# Altium PCB PCB_2021-02-12_03-04-00_2021-02-18.pcbdoc
Units mil, origin at the board's own origin, x right, y up, seen from the top; angles counter-clockwise.
Board outline 4267.5 x 3450 mil, 2 copper layers (Top Layer, Bottom Layer); 52 components, 41 nets, 185 pads, 63 vias.
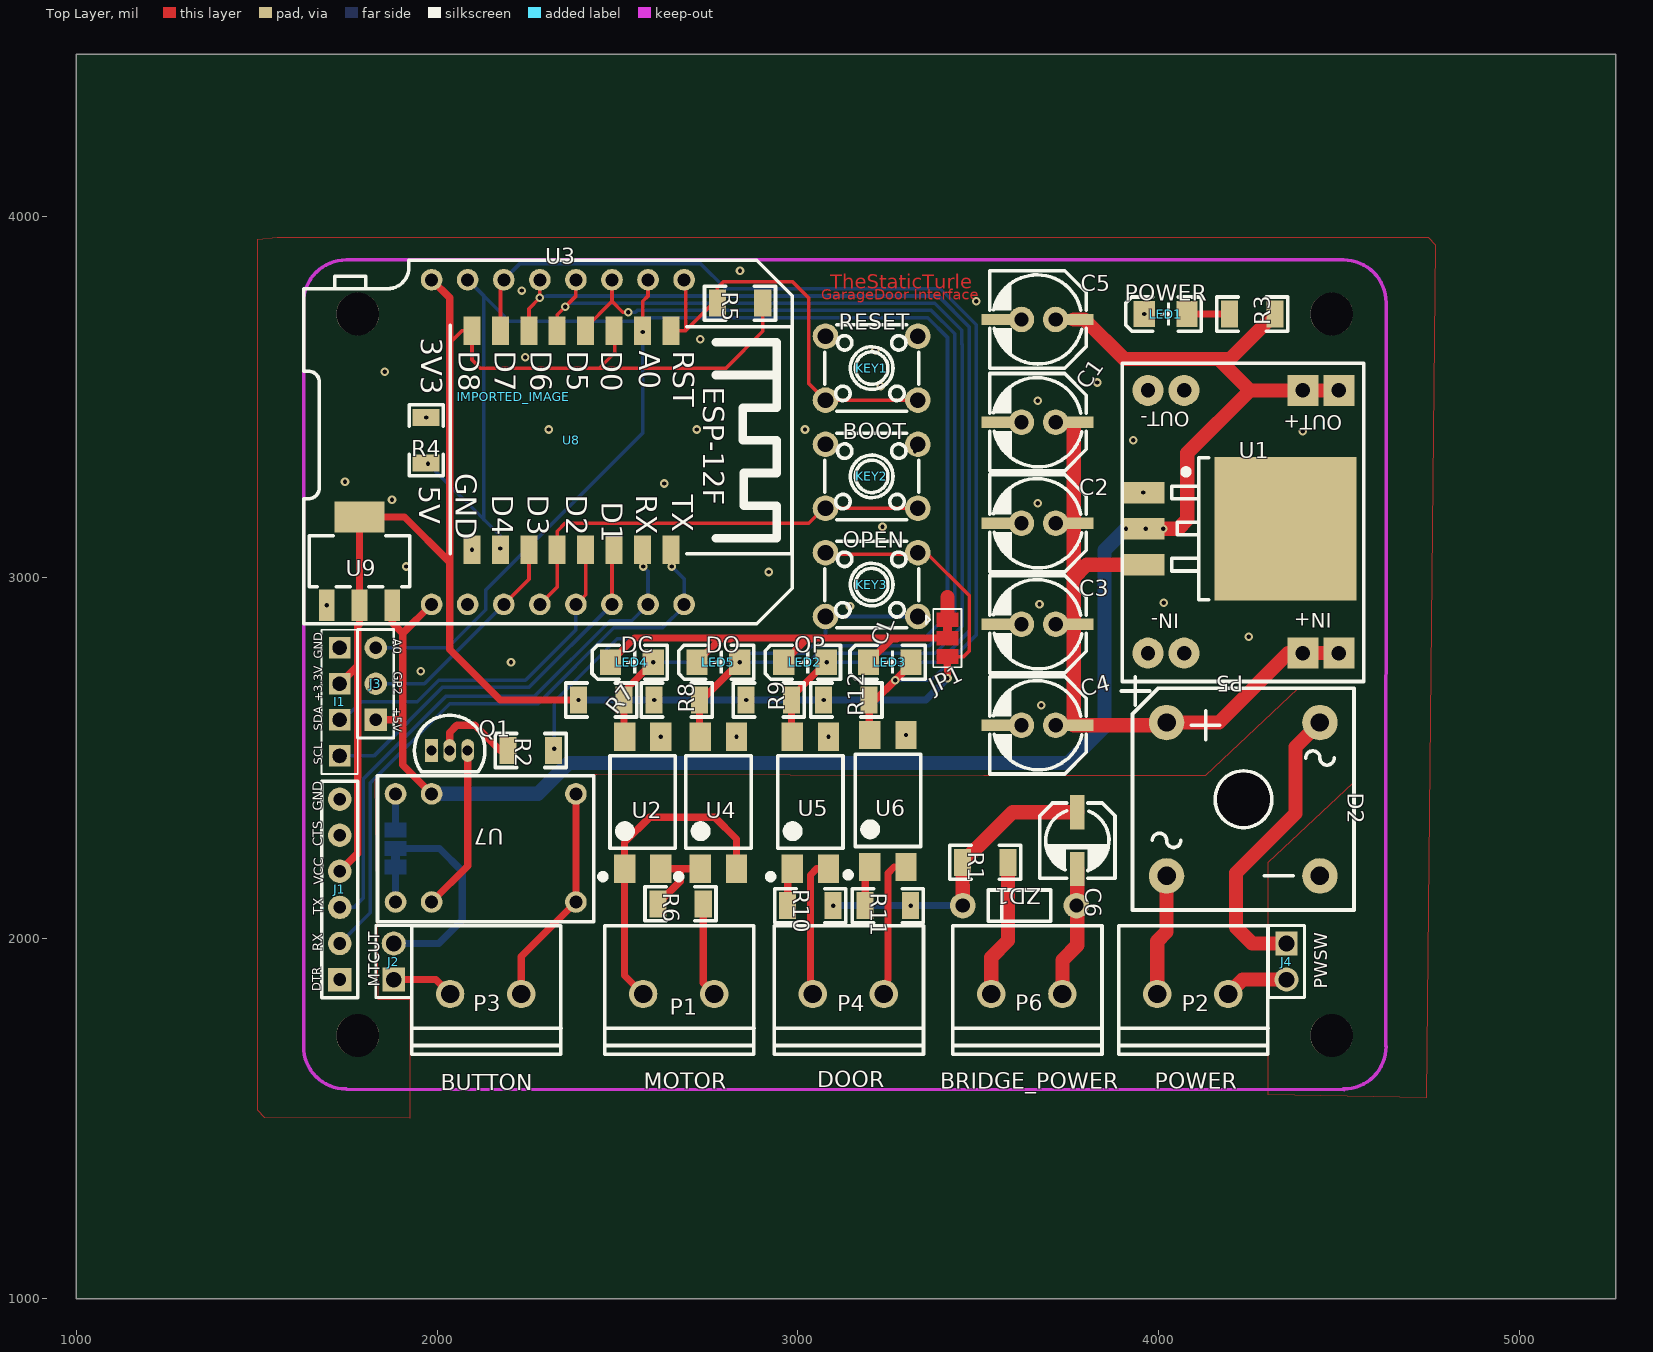
[diagram p0: Top Layer view]
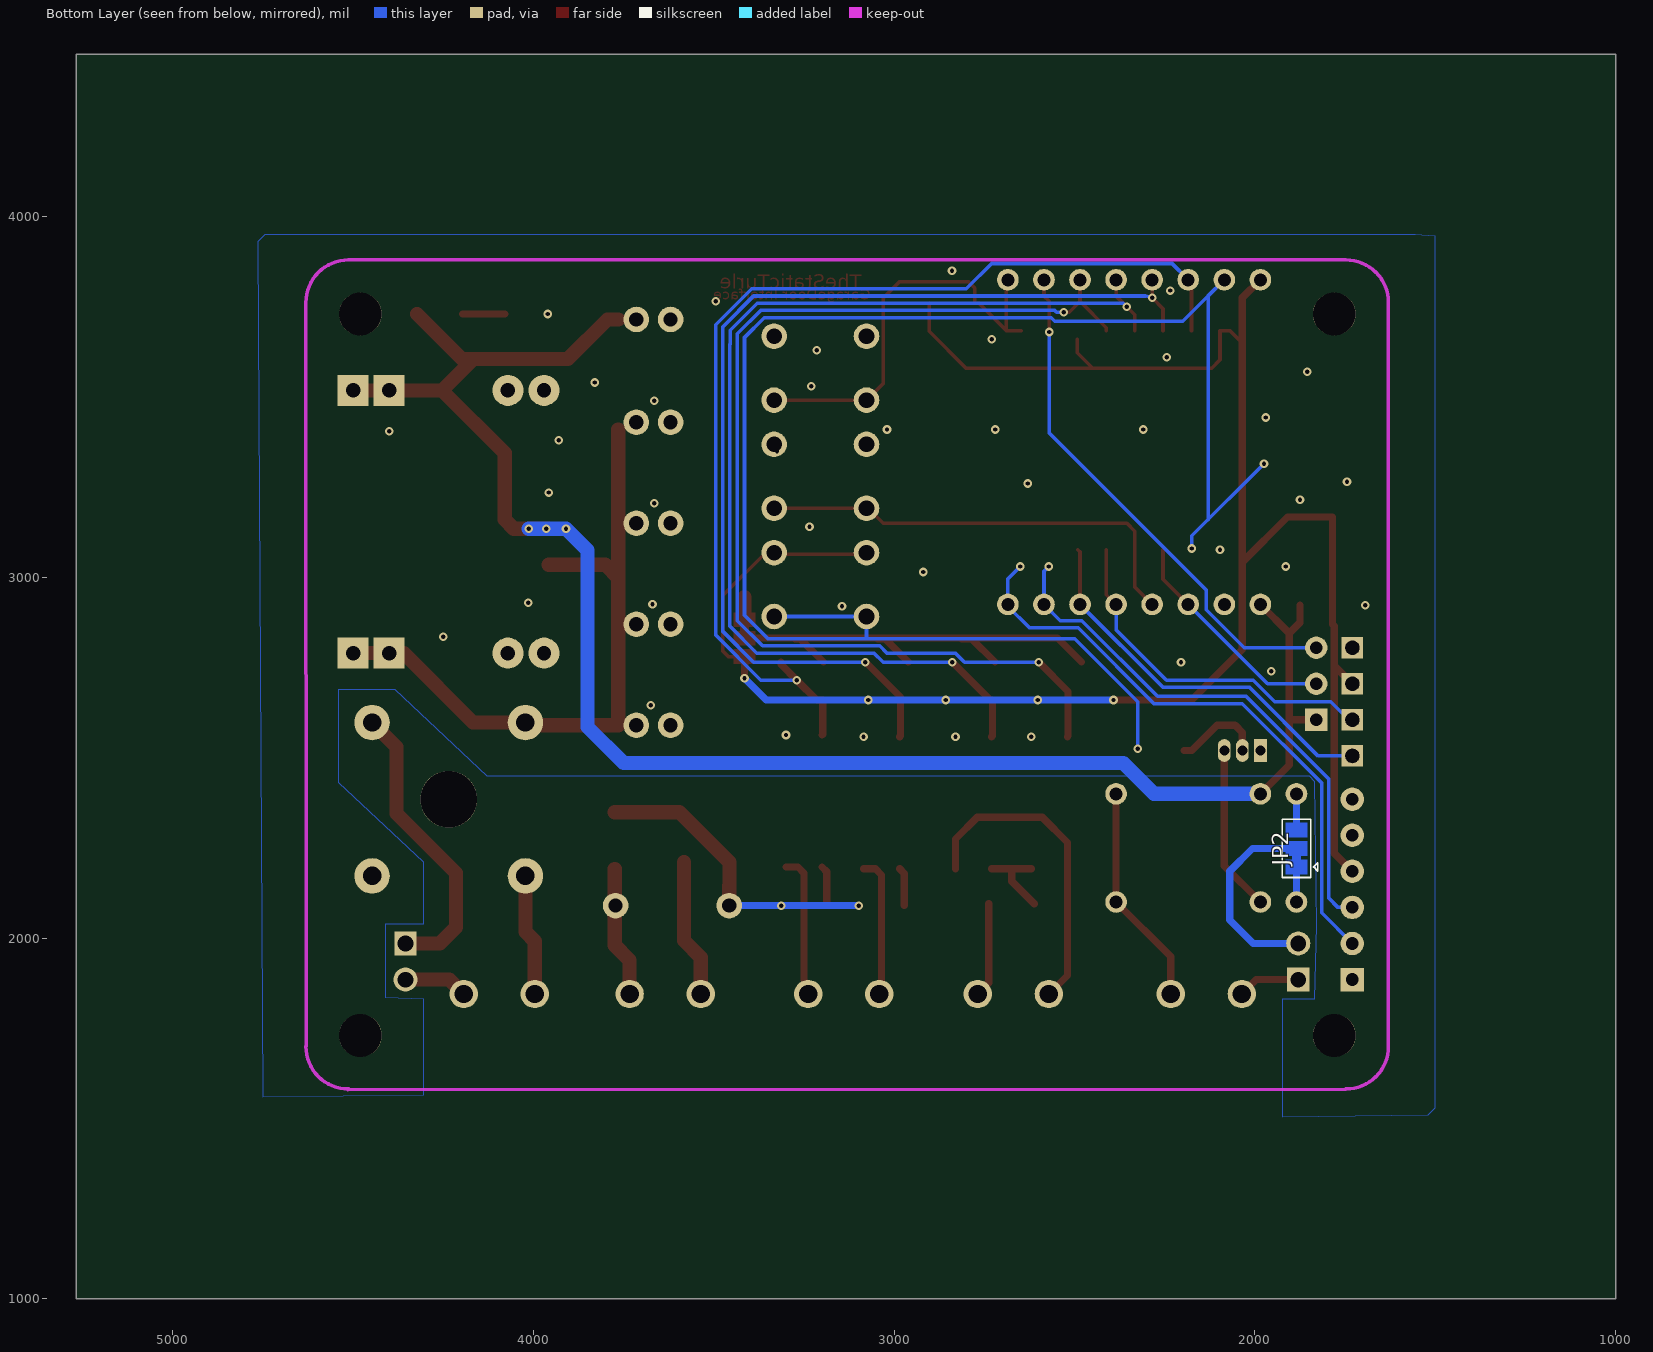
[diagram p1: Bottom Layer view, seen from below]

## Layer stack, top to bottom
Top Layer: signal copper (thickness not stored)
Dielectric: dielectric 12.6, FR-4, Dk 4.8
Bottom Layer: signal copper (thickness not stored)

## Board outline
5267.5,1000 1000,1000 1000,4450 5267.5,4450

## Components (designator, comment, footprint, x,y, rotation, side; value= is the part's Value field where it differs from the comment)
C1 "100u" CAP-D6.3×H5.5 3565,3430 r0 top
C2 "100u" CAP-D6.3×H5.5 3565,3150 r0 top
C3 "100u" CAP-D6.3×H5.5 3565,2870 r0 top
C4 "100u" CAP-D6.3×H5.5 3565,2590 r0 top
C5 "100u" CAP-D6.3×H5.5 3565,3715 r0 top
C6 "10uF" CAP-SMD_BD5.0-L5.3-W5.3-FD 3775,2270 r270 top
D2 "KBPC608" BR-6_4P-L15.2-W15.2-P10.8-BL 4235,2385 r270 top
I1 "I2C" I2C 1730,2655 r270 top
IMPORTED_IMAGE "IMPORTED_IMAGE" IMPORTED_IMAGE 2213.26,3500.59 r0 top
J1 "FTDI" FTDI 1730,2085 r180 top
J2 "MTCUT" HDR-M-2.54_1X2 1880,1935 r90 top
J3 "HDR-M-2.54_1x3" HDR-M-2.54_1X3 1830,2705 r90 top
J4 "PWSW" HDR-M-2.54_1X2 4355,1935 r270 top
JP1 "SolderJumper_3_Bridged23-A500Components" SOLDERJUMPER-3_P1.3MM_BRIDGED12_PAD1.0X1.5MM#1 3460,2815 r270 top
JP2 "SolderJumper_3_Bridged23-A500Components" SOLDERJUMPER-3_P1.3MM_BRIDGED12_PAD1.0X1.5MM#2 1930,2265 r270 bottom
KEY1 "RESET" KEY-TH_4P-L6.0-W6.0-P4.50-LS6.5 3205,3580 r0 top
KEY2 "BOOT" KEY-TH_4P-L6.0-W6.0-P4.50-LS6.5 3205,3280 r0 top
KEY3 "OPEN" KEY-TH_4P-L6.0-W6.0-P4.50-LS6.5 3205,2980 r0 top
LED1 "POWER" LED1206-R-RD 4020,3730 r0 top
LED2 "OP" LED1206-R-RD 3020,2765 r0 top
LED3 "CL" LED1206-R-RD 3255,2765 r0 top
LED4 "DC" LED1206-R-RD 2540,2765 r0 top
LED5 "DO" LED1206-R-RD 2780,2765 r0 top
P1 "MOTOR" CONN-TH_2P-P5.00 2670,1845 r180 top
P2 "POWER" CONN-TH_2P-P5.00 4095,1845 r180 top
P3 "BUTTON" CONN-TH_2P-P5.00 2135,1845 r180 top
P4 "DOOR" CONN-TH_2P-P5.00 3140,1845 r180 top
P5 "DC-DC BUCK STEP DOWN" DC-DC_BUCK 4500,2790 r180 top
P6 "BRIDGE_POWER" CONN-TH_2P-P5.00 3635,1845 r180 top
Q1 "2N2222" TO-92-3_L4.9-W3.7-P1.27-L 2035,2520 r0 top
R1 "10k" R1206 3520,2210 r180 top
R2 "4.7k" R1206 2260,2520 r180 top
R3 "4.7k" R1206 4259.99,3730 r0 top
R4 "10k" R1206 1970,3380 r270 top
R5 "10k" R1206 2840,3760 r0 top
R6 "4.7k" R1206 2675,2095 r180 top
R7 "4.7k" R1206 2455,2660 r0 top
R8 "4.7k" R1206 2665,2660 r0 top
R9 "4.7k" R1206 2920,2660 r0 top
R10 "1.8k" R1206 3034.99,2090 r180 top
R11 "1.8k" R1206 3249.99,2090 r180 top
R12 "4.7k" R1206 3135,2660 r0 top
U1 "UZ1085L-50" TO-263-3_L8.6-W10.2-P2.54-LS14.4-TL 4155,3135 r0 top
U2 "CT817C(SL)(T1)-H" CT817C 2570,2375 r90 top
U3 "WEMOS D1 MINI" "WEMOS D1 MINI" 1985,3825 r0 top
U4 "CT817C(SL)(T1)-H" CT817C 2780,2375 r90 top
U5 "CT817C(SL)(T1)-H" CT817C 3035,2375 r90 top
U6 "CT817C(SL)(T1)-H" CT817C 3250,2380 r90 top
U7 "G2E-187P-M" G2E-187P-M 2135,2250 r0 top
U8 "esp12F" ESP12F_SMD_MIN 2420,3380 r270 top
U9 "AMS1117-3.3" SOT-223-3_L6.5-W3.4-P2.30-LS7.0-BR 1785,3045 r270 top
ZD1 "BZX55C2V7" DO-35_BD2.0-L4.0-P8.00-D0.5-FD 3615,2090 r180 top

## Footprints (in the part's own frame and the unit in brackets; to place one, negate y for a bottom-side part, rotate by r counter-clockwise, add the part's x,y. Pads: shape width x height; smd on the part's side, far side on the other; paste and mask are expansions set on the pad)
BR-6_4P-L15.2-W15.2-P10.8-BL [mm]
  round 2.5 hole 1.3: 1(-5.4,-5.4) 2(5.4,-5.4) 3(5.4,5.4) 4(-5.4,5.4)
  silkscreen extent -8.62,-8.6 7.8,7.8
CAP-D6.3×H5.5 [mm]
  rect 2.8x0.8 smd: 1(5.08,0) 2(0,0)
  silkscreen extent -0.83,-3.43 5.97,3.43
CAP-SMD_BD5.0-L5.3-W5.3-FD [mm]
  rect 2.4x1 smd: 1(-2,0) 2(2,0)
  silkscreen extent -2.65,-2.65 2.65,2.65
CONN-TH_2P-P5.00 [mm]
  round 2 hole 1.3: 1(-2.504,0) 2(2.504,0)
  silkscreen extent -5.32,-4.8 5.21,4.23
CT817C [mm]
  rect 2x1.5 smd: 1(-4.65,1.27) 2(-4.65,-1.27) 3(4.65,-1.27) 4(4.65,1.27)
  silkscreen extent -5.4,-2.3 3.3,3
DC-DC_BUCK [mil]
  rect 85.98x85.98 hole 40: 1(0,0) 1(99.96,0) 3(0,-728.35) 3(100,-728.35)
  round 85.98 hole 40: 2(429.13,0) 2(529.13,0) 4(429.13,-728.35) 4(529.13,-728.35)
  silkscreen extent -69,-803 600,79
DO-35_BD2.0-L4.0-P8.00-D0.5-FD [mm]
  round 1.8 hole 1: 1(-4,0) 2(4,0)
  silkscreen extent -2.2,-1.1 2.2,1.1
ESP12F_SMD_MIN [mm]
  rect 2x1.199 smd: 1(-7.699,5.791) 2(-7.699,3.81) 3(-7.701,1.803) 4(-7.701,-0.203) 5(-7.701,-2.21) 6(-7.701,-4.191) 7(-7.701,-6.198) 8(-7.701,-8.204) 9(7.701,-8.204) 10(7.701,-6.198) 11(7.701,-4.191) 12(7.701,-2.21) 13(7.701,-0.203) 14(7.701,1.803) 15(7.701,3.81) 16(7.701,5.791)
  silkscreen extent -8.1,-9.73 8,14.3
FTDI [mil]
  rect 65x65 hole 35: 1(0,200)
  round 65 hole 35: 2(0,100) 3(0,0) 4(0,-100) 5(0,-200) 6(0,-300)
  silkscreen extent -50,-350 50,250
G2E-187P-M [mil]
  round 60 hole 36: 1(-150,150) 2(-150,-150) 3(250,-150) 3(250,150) 4(-250,-150) 5(-250,150)
  silkscreen extent -300,-205 300,200
HDR-M-2.54_1X2 [mm]
  rect 1.7x1.575 hole 1.1: 1(-1.27,0)
  round 1.7 hole 1.1: 2(1.27,0)
  silkscreen extent -2.54,-1.27 2.54,1.27
HDR-M-2.54_1X3 [mil]
  rect 62x62 hole 35: 1(-100,0)
  round 62 hole 35: 2(0,0) 3(100,0)
  silkscreen extent -150,-50 150,50
I2C [mil]
  rect 59.37x59.37 hole 39.36: GND(-150,0) SCL(150,0) SDA(50,0) VCC(-50,0)
  silkscreen extent -200,-50 200,50
IMPORTED_IMAGE [mil]
KEY-TH_4P-L6.0-W6.0-P4.50-LS6.5 [mm]
  round 1.8 hole 1.1: 1(-3.251,-2.25) 2(3.251,-2.25) 3(3.251,2.25) 4(-3.251,2.25)
  silkscreen extent -3.3,-3.05 3.3,3.05
LED1206-R-RD [mm]
  rect 1.5x1.8 smd: 1(1.5,0) 2(-1.5,0)
  silkscreen extent -2.8,-1.2 2.5,1.2
R1206 [mm]
  rect 1.2x1.9 smd: 1(-1.6,0) 2(1.6,0)
  silkscreen extent -2.5,-1.2 2.5,1.2
SOLDERJUMPER-3_P1.3MM_BRIDGED12_PAD1.0X1.5MM#1 [mil]
  round 0 smd: 1(-67.72,-45.28) 2(-16.54,-45.28) 3(34.64,-45.28)
  Top Layer region: -51.97,-33.47 -32.29,-33.47 -32.29,-57.09 -51.97,-57.09
  Top Layer region: -87.41,-15.76 -48.04,-15.76 -48.04,-74.81 -87.41,-74.81
  Top Layer region: 14.96,-15.76 54.33,-15.76 54.33,-74.81 14.96,-74.81
  Top Layer region: -36.22,-15.76 3.14,-15.76 3.14,-74.81 -36.22,-74.81
  silkscreen extent -97,-104 64,-6
SOLDERJUMPER-3_P1.3MM_BRIDGED12_PAD1.0X1.5MM#2 [mil]
  round 0 smd: 1(67.72,45.28) 2(16.54,45.28) 3(-34.64,45.28)
  Top Layer region: 51.97,33.47 32.29,33.47 32.29,57.09 51.97,57.09
  Top Layer region: 87.41,15.76 48.04,15.76 48.04,74.81 87.41,74.81
  Top Layer region: -14.96,15.76 -54.33,15.76 -54.33,74.81 -14.96,74.81
  Top Layer region: 36.22,15.76 -3.14,15.76 -3.14,74.81 36.22,74.81
  silkscreen extent -64,6 97,104
SOT-223-3_L6.5-W3.4-P2.30-LS7.0-BR [mm]
  rect 2.2x1.1 smd: 1(3.099,-2.3) 2(3.099,0) 3(3.099,2.3)
  rect 2.2x3.5 smd: 4(-3.099,0)
  silkscreen extent -1.8,-3.55 1.8,3.55
TO-92-3_L4.9-W3.7-P1.27-L [mm]
  rect 0.9x1.6 hole 0.7: 1(-1.27,0)
  oval 0.9x1.6 hole 0.7: 2(0,0) 3(1.27,0)
  silkscreen extent -2.48,-1.5 2.48,2.48
TO-263-3_L8.6-W10.2-P2.54-LS14.4-TL [mil]
  rect 118.5x59.5 smd: 1(-197,100) 2(-197,0) 3(-197,-100)
  rect 394.5x398.5 smd: 4(197,0)
  silkscreen extent -118,-197 -16,197
"WEMOS D1 MINI" [mil]
  round 60 hole 36: 1(0,-900) 2(100,-900) 3(200,-900) 4(300,-900) 5(400,-900) 6(500,-900) 7(600,-900) 8(700,-900) 9(700,0) 10(600,0) 11(500,0) 12(400,0) 13(300,0) 14(200,0) 15(100,0) 16(0,0)
  silkscreen extent -354,-954 1000,54

## Free pads (board coordinates)
  round 70.87 hole 39.37: 2(3620,2590) 2(3620,2870) 2(3620,3150) 2(3620,3430) 2(3620,3715) 2(3715,2590) 2(3715,2870) 2(3715,3150) 2(3715,3430) 2(3715,3715)
  round 118.11 hole 118.11 unplated: ""(1780,1730) ""(1780,3730) ""(4480,1730) ""(4480,3730)
  round 157.48 hole 157.48 unplated: ""(4235,2385)

## Via types
v1: diameter 24, hole 12, Top Layer to Bottom Layer, 63 vias

## Nets (pads, with @x,y where several pads share a name; then routed paths per layer and width w, separated by ;. In a path a pad name is that pad's centre, name@x,y a point inside that pad or via, vN(x,y) a via of type N, cw(c..) or ccw(c..) an arc to the next point about the centre after c; other vN are vias at no path point)
+3.3V: I1.VCC J1.4 JP1.3 KEY3.3 KEY3.4 R5.2 R7.1 R8.1 R9.1 R12.1 U3.16 U8.3 U8.8 U9.2 U9.4 | length 5828.6
  Top Layer w10: 2035,3649.72 2068.45,3683.17 U8.8 2097,3603 2120,3580 2450,3580 2492.87,3622.87 U8.3@2492.87,3660 ; 2427.87,3580 2800.99,3580 2902.99,3682 R5.2 ; KEY3.4@3077,3063.6 3328,3063.6 KEY3.3 3356.4,3068.6 3475,2950 3475,2795 3460.36,2780.36 JP1.3
  Top Layer w20: J1.4 1780,2235 1780,2755 ; I1.VCC 1780,2755 ; U3.16 2035,3775 2035,2800 2175,2660 v1(2392,2660) ; 2035,3041.7 1909.69,3167 U9.4 U9.2 1785,2870 1780,2865 1780,2755 ; JP1.3 v1(3415,2720)
  Bottom Layer w20: v1(2392,2660) v1(2602,2660) v1(2857,2660) v1(3072,2660) 3355,2660 v1(3415,2720)
+5V: C5.1 J3.1 P5.3 pad.2@3715,3715 R3.2 U1.2 U3.1 U7.1 U9.3 | length 4963
  Top Layer w20: J3.1 1905,2605.3 ; U9.3 1875.55,2874.45 1905,2845 ; U7.1 1905,2480 1905,2845 ; U3.1 1905,2845
  Top Layer w39.37: C5.1 3795,3715 3905,3605 4166.7,3605 ; U1.2 v1(4013.01,3135) 4055,3135 4080,3160 4080,3345 4253.35,3518.35 ; R3.2 4197.99,3605 4166.7,3605 ; P5.3@4500,3518.35 4400,3518.35 4253.35,3518.35 ; 4166.7,3605 4253.35,3518.35
  Bottom Layer w39.37: U7.1 2280,2400 2365,2485 3750,2485 3850,2585 3850,3075 v1(3910,3135) v1(3965,3135) v1(4013.01,3135)
A0: J3.3 U3.10 U8.2 | length 1449.9
  Top Layer w10: v1(2570,3680) 2570,3765 2585,3780 U3.10
  Bottom Layer w10: J3.3 2030,2805 2135,2910 2135,2965 2570,3400 v1(2570,3680)
AC_15V_IN_A: D2.2 P2.2 | length 338.2
  Top Layer w39.37: P2.2 3996.4,1991.4 4022.4,2017.4 D2.2
AC_15V_IN_B: D2.4 J4.1 | length 822.6
  Top Layer w39.37: J4.1 4260,1985 4215,2030 4215,2180 4380,2345 4380,2530 D2.4
ACTION_RELAY: KEY3.1 KEY3.2 R2.1 R4.2 U3.15 U8.10 | length 4815.1
  Bottom Layer w10: v1(1975,3315) 2175,3115 v1(2175,3080) ; 2130.04,3159.96 2130.04,3779.96 U3.15 2200,3710 2555,3710 2565,3720 3360,3720 3415,3665 3415,2895 3350,2830 2500,2830 2325,2655 v1(2325,2525) ; 3076.71,2830 3077,2830.29 KEY3.1 ; KEY3.1@3077,2886.4 3082,2891.4 KEY3.2
BOOT: KEY2.1 KEY2.2 U3.4 U8.12 | length 1246.2
  Top Layer w10: U3.4 2333,2973 U8.12 2333,3128 2355,3150 3030.6,3150 KEY2.1@3072,3191.4 ; KEY2.1@3072,3196.4 KEY2.1 KEY2.2@3328,3191.4
DOOR_BUTTON_A: J2.1 P3.2 | length 173
  Top Layer w20: J2.1 1996.4,1885 P3.2
DOOR_BUTTON_B: P3.1 U7.3 | length 617.7
  Top Layer w20: P3.1 2233.6,1948.6 2385,2100 U7.3@2385,2400
DOOR_CLOSED: LED3.1 R12.2 U3.14 U6.4 U8.7 | length 2942.2
  Top Layer w10: U8.7 2176,3816 U3.14
  Top Layer w20: U6.4 3197.99,2565.08 R12.2 3215,2660 v1(3270,2715) 3314.05,2759.05 LED3.1@3314.05,2765
  Bottom Layer w10: U3.14 2230,3870 2730,3870 2800,3800 3395,3800 3495,3700 3495,2840.03 3369.97,2715 v1(3270,2715)
DOOR_CLOSING: LED4.1 R7.2 U2.4 U3.11 U8.4 | length 3143.4
  Top Layer w10: U8.4 2412,3692 2485,3765 ; v1(2530,3735) 2515,3735 2485,3765 ; 2485,3765 U3.11 2485,3765
  Top Layer w20: U2.4 2517.99,2560.08 R7.2 2518,2683.9 v1(2599.1,2765)
  Bottom Layer w10: v1(2530,3735) 2550,3735 2555,3740 3091.63,3740 ; v1(2599.1,2765) 2805,2765 2830,2790 3020,2790 3040,2810 3365,2810 3435,2880 3435,3675 3370,3740 3091.6,3740
DOOR_OPEN: LED2.1 R9.2 U3.13 U5.4 U8.6 | length 2953.2
  Top Layer w10: U8.6 2255,3745 v1(2285,3775) ; v1(2285,3775) U3.13 v1(2285,3775)
  Top Layer w20: U5.4 2982.99,2560.08 R9.2 2983,2668 v1(3080,2765)
  Bottom Layer w10: v1(2285,3775) 2305,3780 3390,3780 3475,3695 3475,3598.9 3475,2850 3390,2765 v1(3080,2765)
  other v1: 3080,2765
DOOR_OPENING: LED5.1 R8.2 U3.12 U4.4 U8.5 | length 3120.6
  Top Layer w10: U8.5 2333,3728 2385,3780 ; v1(2355,3750) 2385,3780 ; 2385,3780 U3.12 2385,3780
  Top Layer w20: U4.4 2727.99,2560.08 R8.2 2734.05,2660 v1(2839.06,2765)
  Bottom Layer w10: v1(2355,3750) 2365,3760 3380,3760 3455,3685 3455,3646.7 ; v1@2840,2765 3030.9,2765 3055.9,2790 3380.9,2790 3455.9,2865 3455.9,3646.7
GND: C1.2 C2.2 C3.2 C4.2 C5.2 D2.3 I1.GND J1.6 JP1.1 KEY1.3 KEY1.4 KEY2.3 KEY2.4 LED1.2 P5.2 P5.4 pad.2@3620,2590 pad.2@3620,2870 pad.2@3620,3150 pad.2@3620,3430 pad.2@3620,3715 Q1.1 R4.1 U1.1 U2.3 U3.2 U4.3 U5.3 U6.3 U8.9 U9.1 | length 62.3
  Top Layer w39.37: JP1.1 3415,2945
  other v1: 2620,2558.07 2830,2558.07 3085,2558.07 3300,2563.07 3675,2645 1955,2740 2205,2765 4250,2835 3145,2920 1694.45,2923 3670,2925 4015,2930 2920,3015 1915,3030 2097,3076.82 3235,3140 3665,3205 1875,3215 3958,3235 2630,3260 1745,3265 3325,3350 3930,3380 4400,3405 2310,3410 2720,3410 3020,3410 1970,3443 3665,3490 3230,3530 3830,3540 1855,3570 2245,3610 3215,3630 2730,3660 3960.95,3730 3495,3765 2235,3795 2840,3850
GND_BRIDGE: C6.2 P6.1 ZD1.1 | length 365.5
  Top Layer w39.37: P6.1 3733.6,1938.6 3775,1980 3775,2087.5 ZD1.1 3775,2092.52 C6.2
GPIO2: J3.2 U3.3 U8.11 | length 626.9
  Top Layer w10: U3.3 2255,2995 U8.11
  Bottom Layer w10: J3.2 1965,2705 U3.3
INPUT_DOOR_CLOSED: P4.1 U6.2 | length 393.6
  Top Layer w20: P4.1 3250,1885 3250,2180 3266.9,2196.9 U6.2
INPUT_DOOR_OPEN: P4.2 U5.2 | length 387.7
  Top Layer w20: P4.2 3035,1874.9 3035,2175 3051.9,2191.9 U5.2
J1_1: J1.1
J1_5: J1.5
JP2_2: J2.2 JP2.2 | length 548.7
  Bottom Layer w20: J2.2 2005,1985 2070,2050 2070,2185 2006.5,2248.5 1899.5,2248.5
LED1_1: LED1.1 R3.1 | length 117.9
  Top Layer w20: LED1.1@4079.05,3730 R3.1
LED2_2: JP1.2 LED2.2 LED3.2 LED4.2 LED5.2 | length 1298.1
  Top Layer w20: LED4.2 2547.49,2831.54 JP1.2 ; LED5.2 2785.95,2830 2813.62,2830 ; LED2.2 3025.95,2830 3045.62,2830 ; LED3.2 3260.95,2830 3274.62,2830
MOTOR_A: P1.2 U2.1 U4.2 | length 888.2
  Top Layer w20: P1.2 2520,1896.4 U2.1 2520,2265 2590,2335 2770,2335 2830,2275 U4.2
MOTOR_B: P1.1 R6.1 | length 262.7
  Top Layer w20: R6.1 2738,1875.6 P1.1
P2_1: J4.2 P2.1 | length 178
  Top Layer w39.37: P2.1 4233.6,1885 J4.2
Q1_2: Q1.2 R2.2 | length 249.3
  Top Layer w20: Q1.2 2035,2570 2055,2590 2105,2590 2175,2520 R2.2
R10_2: R10.2 U5.1 | length 107.3
  Top Layer w20: R10.2 2972.01,2178.94 U5.1
RESET: KEY1.1 KEY1.2 R5.1 U3.9 U8.1 | length 1188.1
  Top Layer w10: U8.1 2688.12,3683.12 2690,3685 ; U3.9 2690,3820 2690,3685 ; KEY1.1@3072,3491.4 KEY1.2 ; KEY1.1 3030,3538.4 3030,3775 2985,3820 2795,3820 2777,3802 R5.1 2765,3760 2690,3685
RX: J1.2 U3.8 U8.16 | length 1677.5
  Bottom Layer w10: J1.2 1815,2070 1815,2430 2035,2650 2280,2650 2490,2860 2625,2860 2685,2920 U3.8 2685,2995.34 v1(2650.35,3029.99)
SCL: I1.SCL U3.6 U8.14 | length 1083.3
  Top Layer w10: U3.6 2485,3070.82 U8.14
  Bottom Layer w10: I1.SCL 1825,2505 2015,2695 2255,2695 U3.6
SDA: I1.SDA U3.5 U8.13 | length 991.6
  Top Layer w10: U3.5 2412,2952 U8.13
  Bottom Layer w10: I1.SDA 1740,2605 1790,2655 1945,2655 2005,2715 2245,2715 2385,2855 U3.5
TX: J1.3 U3.7 U8.15 | length 1506.8
  Bottom Layer w10: J1.3 1770,2085 1795,2110 1795,2440 2025,2670 2270,2670 2480,2880 2540,2880 U3.7 2585,3016.61 v1(2571.61,3030)
U4_1: R6.2 U2.2 U4.1 | length 232.8
  Top Layer w20: R6.2 2674.36,2157.36 2674.36,2191.93 ; U2.2 U4.1
U6_1: R11.2 U6.1 | length 112.3
  Top Layer w20: R11.2 3187.01,2183.94 U6.1
U7_2: Q1.3 U7.2 | length 461.4
  Top Layer w20: U7.2 2085,2200 Q1.3
U7_4: JP2.1 U7.4 | length 96.9
  Bottom Layer w20: 1884.7,2196.9 U7.4
U7_5: JP2.3 U7.5 | length 100.4
  Bottom Layer w20: JP2.3 U7.5
VCC: C1.1 C2.1 C3.1 C4.1 D2.1 P5.1 pad.2@3715,2590 pad.2@3715,2870 pad.2@3715,3150 pad.2@3715,3430 U1.3 | length 1845.7
  Top Layer w39.37: 3765,2999.12 3800.88,3035 U1.3 ; 3765,3410 3765,3130 3765,2850 C4.1 3990,2590 3997.6,2597.6 D2.1 4167.6,2597.6 4360,2790 P5.1@4500,2790
VCC_BRIDGE: P6.2 R1.1 | length 384.3
  Top Layer w39.37: P6.2 3536.4,1946.4 3583,1993 R1.1
VCC_BRIDGE_2.7V: C6.1 R1.2 R10.1 R11.1 ZD1.2 | length 855
  Top Layer w39.37: ZD1.2 R1.2 3595.75,2348.74 C6.1
  Bottom Layer w20: v1(3098,2090) v1(3313,2090) ZD1.2
pads on no net: U1.4

## Polygon pours and split planes (outlines as drawn)
GND on Top Layer (solid): 1557.5,3942.5 4747.5,3942.5 4767.5,3922.5 4742.5,1557.5 4305,1565 4305,1835 4405,1835 4405,2035 4305,2035 4305,2210 4540,2430 4540,2690 4385,2690 4130,2450 3515,2450 2442.5,2452.5 1842.5,2452.5 1827.5,2437.5 1835,1830 1925,1830 1925,1500 1522.5,1502.5 1502.5,1522.5 1502.5,3937.5
GND on Bottom Layer (solid): 1555,3950 4745,3950 4765,3930 4750,1560 4305,1565 4305,1830 4410,1835 4410,2040 4305,2040 4305,2210 4540,2430 4540,2690 4385,2690 4130,2450 3500,2450 1850,2450 1835,2435 1830,2035 1835,1830 1925,1830 1925,1505 1520,1510 1500,1530 1500,3945

## Keep-outs
Keep-Out Layer:
  lines w10: 1630,1699.61 ccw(c1748.11,1699.61) 1748.11,1581.5 ; 1630,3761.89 cw(c1748.11,3761.89) 1748.11,3880 ; 4512.8,1581.5 ccw(c4512.8,1699.61) 4630.9,1699.61 ; 4512.8,3880 cw(c4512.8,3761.89) 4630.9,3761.89

## Other copper
Top Layer:
  text "TheStaticTurle" at 3090,3800.32 h39.37
  text "GarageDoor Interface" at 3065,3770.24 h29.53

## Silkscreen, mask and mechanical layers (free items; w line width, h text height)
Top Overlay:
  text "A0" at 1878.19,2830 h23.62 r270
  text "GP2" at 1880.44,2737.67 h23.62 r270
  text "+5V" at 1878.19,2640 h23.62 r270
Document:
  lines w0.1: 3132.75,2724 3134.75,2726

## Text inside footprints (layer, text, board x,y; h text height)
I1: Top Overlay "GND" at 1681.81,2775 h23.62 r90; Top Overlay "+3.3V" at 1681.81,2655 h23.62 r90; Top Overlay "SDA" at 1681.81,2575 h23.62 r90; Top Overlay "SCL" at 1681.81,2480 h23.62 r90
J1: Top Overlay "RX" at 1682.23,1964.13 h26.38 r90; Top Overlay "TX" at 1683.61,2064.57 h26.38 r90; Top Overlay "VCC" at 1684.47,2148.26 h26.38 r90; Top Overlay "DTR" at 1678.09,1853.26 h23.62 r90; Top Overlay "GND" at 1681.71,2352.4 h26.38 r90; Top Overlay "CTS" at 1682.23,2254.13 h26.38 r90
P5: Top Overlay "IN+" at 4480.27,2900.75 h40 r180; Top Overlay "IN-" at 4057.08,2898.59 h40 r180; Top Overlay "OUT+" at 4509.84,3449.76 h40 r180; Top Overlay "OUT-" at 4086.61,3459.61 h40 r180
U3: Top Overlay "RST" at 2655.49,3628.69 h59.05 r270; Top Overlay "A0" at 2560.49,3628.7 h59.05 r270; Top Overlay "D0" at 2455.49,3628.7 h59.05 r270; Top Overlay "D5" at 2360.49,3628.7 h59.05 r270; Top Overlay "D6" at 2260.49,3628.69 h59.05 r270; Top Overlay "D7" at 2160.49,3628.7 h59.05 r270; Top Overlay "D8" at 2060.49,3628.7 h59.05 r270; Top Overlay "3V3" at 1956.87,3664.12 h59.05 r270; Top Overlay "TX" at 2651.87,3229.12 h59.05 r270; Top Overlay "RX" at 2551.87,3229.12 h59.05 r270; Top Overlay "D1" at 2456.87,3209.12 h59.05 r270; Top Overlay "D2" at 2357.71,3229.13 h59.05 r270; Top Overlay "D3" at 2251.87,3229.12 h59.05 r270; Top Overlay "D4" at 2152.71,3229.13 h59.05 r270; Top Overlay "GND" at 2051.87,3289.12 h59.05 r270; Top Overlay "5V" at 1950.49,3253.7 h59.05 r270
U8: Top Overlay "ESP-12F" at 2737.59,3528.67 h59.05 r270